# Altium PCB LCD_KB_Controller.PcbDoc (part 1 of 2)
Units mm, origin at the board's own origin, x right, y up, seen from the top; angles counter-clockwise.
Board outline 65 x 95 mm, 2 copper layers (Top Layer, Bottom Layer); 145 components, 109 nets, 476 pads, 326 vias.
Unrouted connection lines stored in the file: 275.
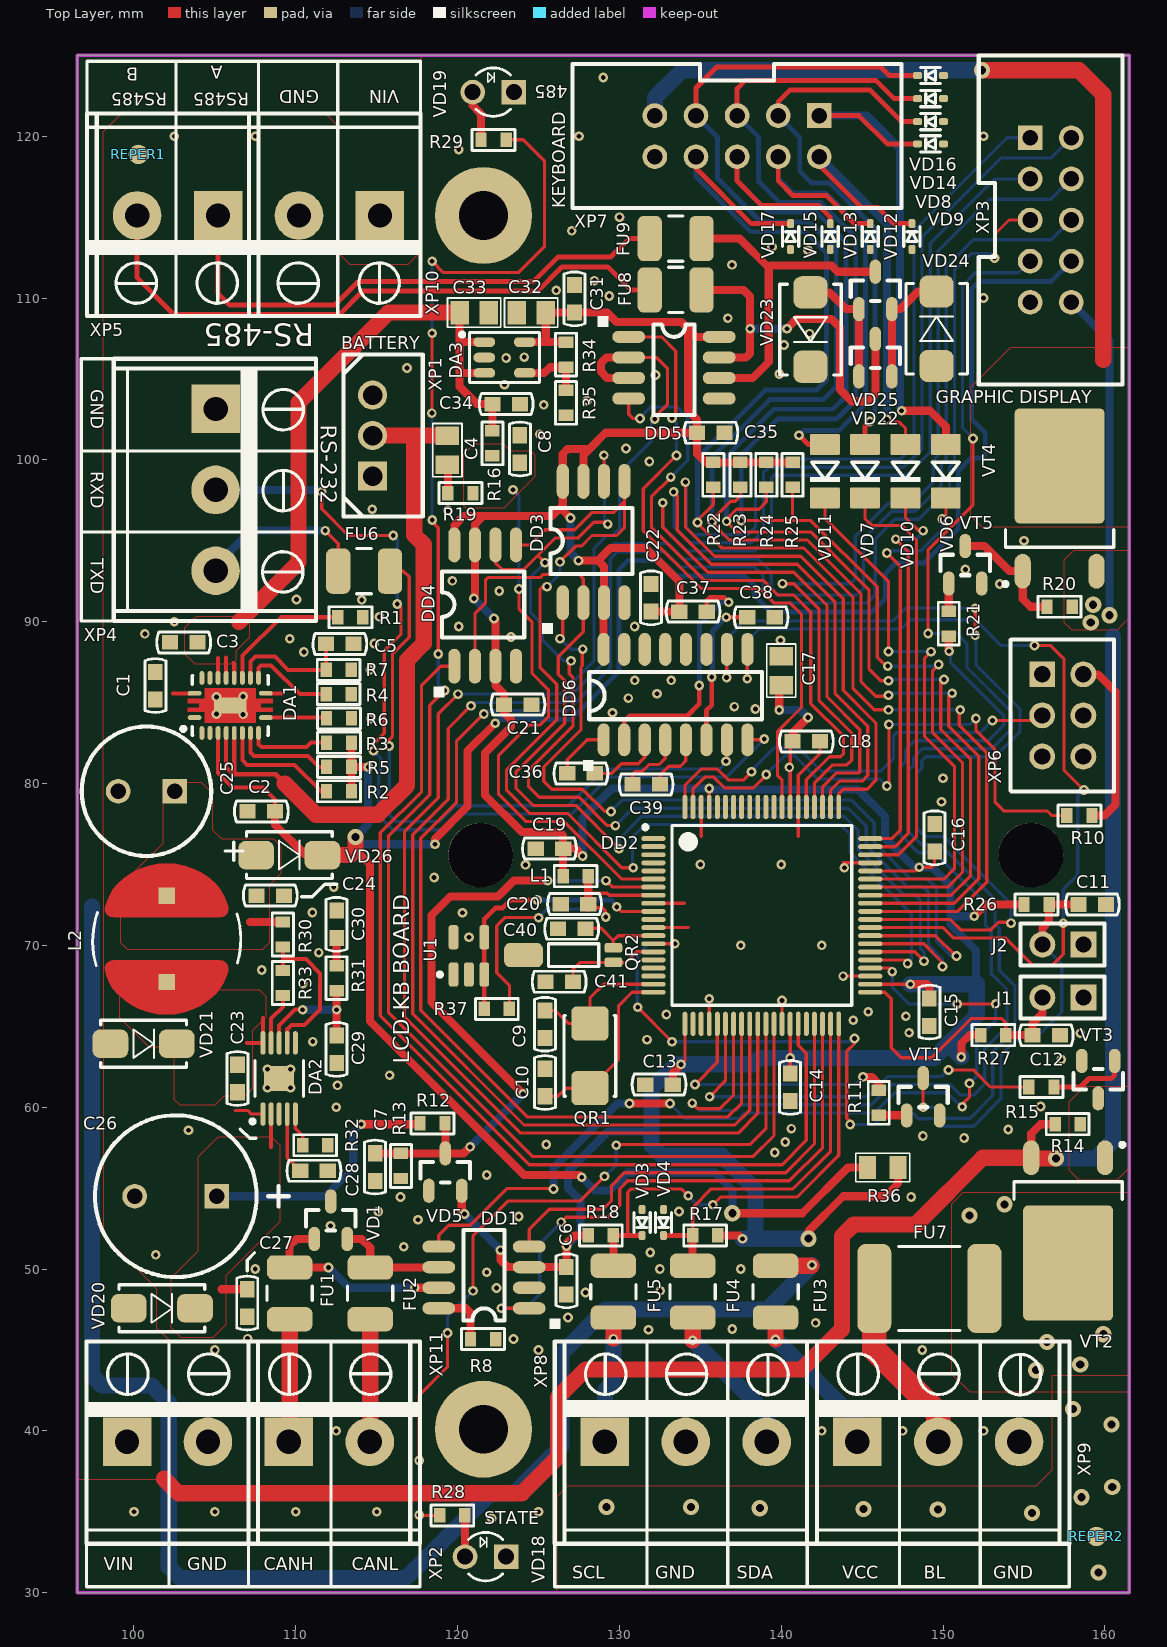
[diagram p0: Top Layer view]
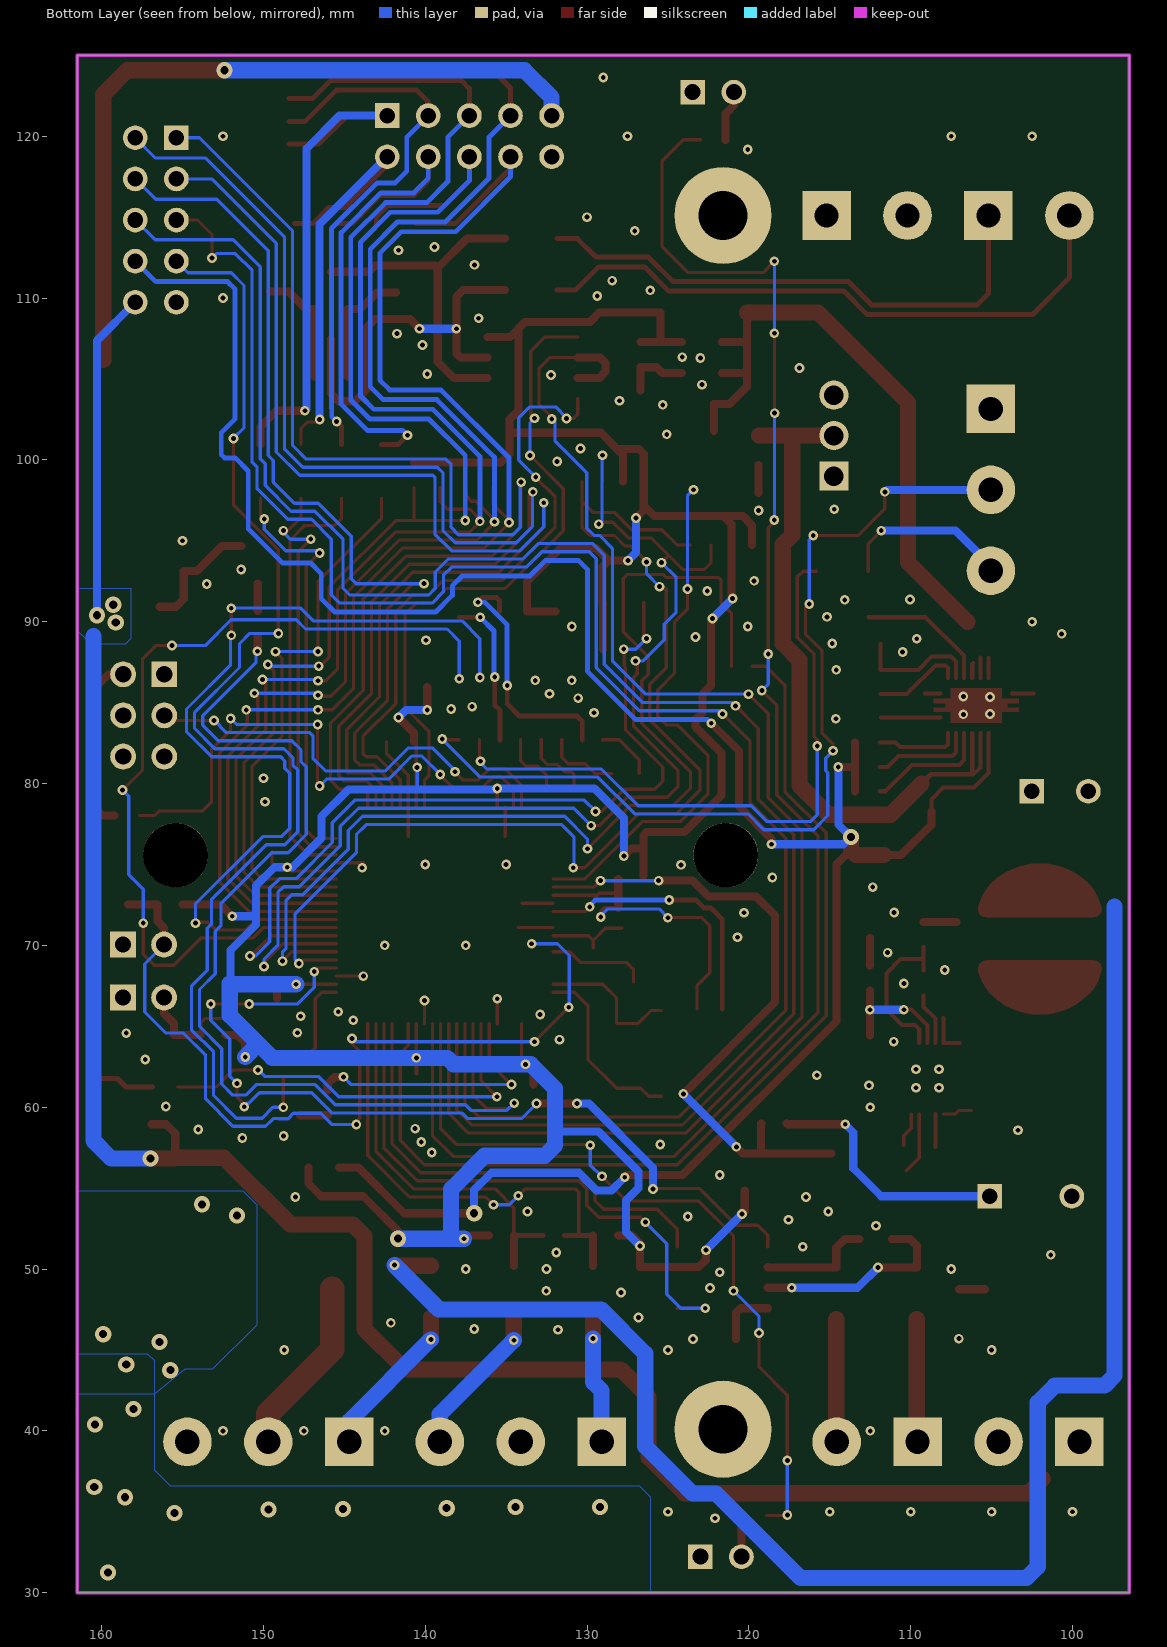
[diagram p1: Bottom Layer view, seen from below]

## Layer stack, top to bottom
Top Solder: solder mask 0.0102, Solder Resist, Dk 3.5
Top Layer: signal copper 0.0356
Dielectric 1: dielectric 0.32, FR-4, Dk 4.8
Bottom Layer: signal copper 0.0356
Bottom Solder: solder mask 0.0102, Solder Resist, Dk 3.5

## Board outline
96.5,30 96.5,125 161.5,125 161.5,30

## Design rules (kind name [scope] priority, off if disabled: settings)
Clearance Clearance_1 [InComponent('DA2') OR InComponent('DA1') OR InComponent('DD2')] p1: gap=0.2 ignorepadtopadclearanceinfootprint=FALSE except(0: Arc-Hole Track-Hole SMDPad-Hole THPad-Hole Via-Hole Fill-Hole Poly-Hole Region-Hole Text-Hole)
Clearance [All] p2: gap=0.3 ignorepadtopadclearanceinfootprint=FALSE except(0: Arc-Hole Track-Hole SMDPad-Hole THPad-Hole Via-Hole Fill-Hole Poly-Hole Region-Hole Text-Hole)
ComponentClearance [All] p1: gap=0.15 collisioncheckmode=3 verticalgap=2540 showdistances=FALSE
HoleSize [All] p1: absolutevalues=TRUE maxlimit=5 minlimit=0.025 maxpercent=80.000 minpercent=20.000
MinimumSolderMaskSliver [All] p1: minsoldermaskwidth=0.15
PolygonConnect PolygonConnect_2 [InComponent('FU7') OR InComponent('XP2') OR InComponent('XP8') OR InComponent('XP9') OR InComponent('XP10') OR InComponent('XP1') OR InComponent('XP4') OR InComponent('XP7')] p1: connectstyle=Relief reliefconductorwidth=0.5 reliefentries=4 polygonreliefangle="90 Angle" airgapwidth=0.3
PolygonConnect PolygonConnect_1 [IsVia OR InComponent('DA2') AND InNet('GND') OR InComponent('VT2') AND InNet('NetFU7_2') OR InNet('NetVT4_2')] p2: connectstyle=Direct reliefconductorwidth=0.254 reliefentries=4 polygonreliefangle="90 Angle" airgapwidth=0.254
PolygonConnect [All] p3: connectstyle=Relief reliefconductorwidth=0.3 reliefentries=4 polygonreliefangle="90 Angle" airgapwidth=0.3
RoutingVias [All] p1: holewidth=0.4 width=0.8 viastyle="Through Hole" minholewidth=0.3 minwidth=0.6 maxholewidth=1 maxwidth=1
SilkToSilkClearance [All] p1: silktosilkclearance=0.15
SilkToSolderMaskClearance [IsPad] p1: minsilkscreentomaskgap=0.15 clearancetoexposedcopper=TRUE
SolderMaskExpansion [All] p1: expansion=0.102
Width [All] p1: maxlimit=3 minlimit=0.2 preferedwidth=0.5
25 further rules are at their usual default settings.

## Classes and differential pairs
component class RS485: C35 DD5 FU8 FU9 VD22 VD23 VD24 VD25
component class Power: C23 C24 C25 C26 C27 C28 C29 C30 C31 C32 C33 C34 DA2 DA3 L2 R30 R31 R32 R33 R34 R35 R36 VD20 VD21 VD26
component class MCU: C9 C10 C11 C12 C13 C14 C15 C16 C17 C18 C19 C20 C21 C22 C40 C41 DD2 DD3 DD4 J1 J2 L1 QR1 QR2 R26 R27 R28 R29 R37 REPER1 REPER2 U1 VD18 VD19
component class Keyboard: R20 R21 R22 R23 R24 R25 VD6 VD7 VD8 VD9 VD10 VD11 VD12 VD13 VD14 VD15 VD16 VD17 VT4 VT5
component class Connection: C7 C8 FU3 FU4 FU5 FU7 R10 R11 R12 R13 R14 R15 R16 R17 R18 R19 VD3 VD4 VD5 VT1 VT2 VT3 XP2 XP3 XP4 XP5 XP6 XP7 XP8 XP9 XP10 XP11
component class CAN: C6 DD1 FU1 FU2 R8 VD1
component class Battery: C1 C2 C3 C4 C5 DA1 R1 R2 R3 R4 R5 R6 R7 XP1
component class RS232: C36 C37 C38 C39 DD6 FU6

## Components (designator, comment, footprint, x,y, rotation, side; value= is the part's Value field where it differs from the comment)
C1 "0.1uF" CC0603#1 101.325,86.05 r90 top
C2 "1uF" CC0603#1 107.875,78.275 r180 top
C3 "1uF" CC0603#1 103.075,88.725 r0 top
C4 "10uFx6.3V" CC0805 119.375,100.6 r90 top
C5 "10nF" CC0603#1 112.725,88.625 r0 top
C6 "0.1uF" CC0603#1 126.725,49.275 r270 top
C7 "0.1uF" CC0603#1 114.9,56.3 r90 top
C8 "0.1uF" CC0603#1 123.85,100.675 r270 top
C9 "22pF" CC0603#1 125.4,65.125 r90 top
C10 "22pF" CC0603#1 125.4,61.525 r270 top
C11 "220pF" CC0603#1 159.225,72.525 r180 top
C12 "220pF" CC0603#1 156.375,64.45 r180 top
C13 "0.1uF" CC0603#1 132.45,61.4 r0 top
C14 "0.1uF" CC0603#1 140.55,61.225 r90 top
C15 "0.1uF" CC0603#1 149.15,65.875 r90 top
C16 "0.1uF" CC0603#1 149.475,76.65 r270 top
C17 "10uFx6.3V" CC0805 140,86.975 r270 top
C18 "0.1uF" CC0603#1 141.55,82.6 r180 top
C19 "0.1uF" CC0603#1 125.675,75.975 r0 top
C20 "0.1uF" CC0603#1 127.225,72.55 r0 top
C21 "0.1uF" CC0603#1 123.725,84.875 r0 top
C22 "0.1uF" CC0603#1 131.95,91.475 r90 top
C23 "0.1 uF" CC0603#1 106.4,61.775 r270 top
C24 "0.1 uF" CC0603#1 108.425,73.075 r0 top
C25 "1000uFx6.3V" CC8X3.5 102.525,79.525 r180 top
C26 "470uFx35V" CC16X10_CAP0.5(1)(Primary) 105.125,54.5 r180 top
C27 "0.1 uF" CC0603#1 107,47.9 r270 top
C28 "10 nF" CC0603#1 111.125,56.075 r0 top
C29 "330pF" CC0603#1 112.525,63.575 r270 top
C30 "560pF" CC0603#1 112.525,71.3 r90 top
C31 "0.1uF" CC0603#1 127.225,109.95 r90 top
C32 "10uFx6.3V" CC0805 124.55,109.1 r0 top
C33 "10uF 6.3V" CC0805 121.025,109.1 r180 top
C34 "0.1uF" CC0603#1 123,103.45 r0 top
C35 "0.1uF" CC0603#1 135.65,101.675 r180 top
C36 "0.1uF" CC0603#1 127.625,80.625 r180 top
C37 "0.1uF" CC0603#1 134.55,90.625 r0 top
C38 "0.1uF" CC0603#1 138.75,90.275 r180 top
C39 "0.1uF" CC0603#1 131.65,79.95 r180 top
C40 "22pF" CC0603#2 127.05,71.025 r0 top
C41 "22pF" CC0603#2 126.275,67.75 r0 top
DA1 "BQ24070" P-PQFP-N20 105.95,84.825 r0 top
DA2 "TPS54260DGQ" S-PDSO-G10 107.975,59.575 r90 top
DA3 "AP2210K-ADJTRG1" SOT23-5 122.9,106.325 r0 top
DD1 "SN65HVD234D" SO-8 124.425,47.575 r90 top
DD2 "LPC1754FBD80" TQFP-80_0.5 138.8,71.85 r0 top
DD3 "M25PE16" EIAJ_SO8 126.5,91.175 r90 top
DD4 "M25PE16" EIAJ_SO8 119.8,87.25 r90 top
DD5 "SP485EEN" SO-8 130.575,107.6 r270 top
DD6 "ST232BD/CD" SO16_M 129.025,82.7 r90 top
FU1 "MICROSMD010F-2" RC1210 109.625,48.5 r270 top
FU2 "MICROSMD010F-2" RC1210 114.6,48.5 r270 top
FU3 "MICROSMD010F-2" RC1210 139.65,48.6 r90 top
FU4 "MICROSMD010F-2" RC1210 134.525,48.6 r90 top
FU5 "MICROSMD010F-2" RC1210 129.625,48.6 r90 top
FU6 "MICROSMD010F-2" RC1210 114.225,93.125 r180 top
FU7 "SL110-33" FSMD2920 149.15,48.8 r0 top
FU8 "MICROSMD010F-2" RC1210 133.475,110.5 r180 top
FU9 "MICROSMD010F-2" RC1210 133.475,113.675 r180 top
J1 "PLS-02" PLS-02 158.675,66.775 r180 top
J2 "PLS-02" PLS-02 158.675,70.05 r180 top
L1 "10uH" L0603 126.525,74.275 r0 top
L2 "15uH" SDR0805 102.025,70.4 r90 top
QR1 "NX5032GA-12.000MHz LN-CD-1" AC5032_2 128.175,63.175 r270 top
QR2 "MS3V-T1R" MS3V-T1R 129.625,68.95 r180 top
R1 "51k" RC0603 113.375,90.275 r0 top
R2 "100k" RC0603 112.675,79.525 r0 top
R3 "100k" RC0603 112.675,82.525 r0 top
R4 "10k" RC0603 112.65,85.525 r0 top
R5 "100k" RC0603 112.675,81.025 r0 top
R6 "2k" RC0603 112.675,84.025 r0 top
R7 "36k" RC0603 112.65,87.025 r0 top
R8 "0E" RC0603 121.575,45.675 r0 top
R10 "100E" RC0603 158.425,78.025 r0 top
R11 "n.p" RC0603 146.025,60.275 r270 top
R12 "120k" RC0603 118.45,59 r0 top
R13 "10k" RC0603 116.5,56.375 r90 top
R14 "10k" RC0603 157.7,58.95 r180 top
R15 "10k" RC0603 156.075,61.25 r0 top
R16 "12k1" RC0603 122.15,101.025 r90 top
R17 "2k2" RC0603 135.3,52.075 r0 top
R18 "2k2" RC0603 128.85,52.075 r180 top
R19 "20k1" RC0603 120.175,97.95 r0 top
R20 "10k" RC0603 157.2,90.925 r0 top
R21 "10k" RC0603 150.35,89.875 r90 top
R22 "10k" RC0603 135.8,99.075 r270 top
R23 "10k" RC0603 137.475,99.075 r270 top
R24 "10k" RC0603 139.075,99.075 r270 top
R25 "10k" RC0603 140.7,99.075 r270 top
R26 "10k" RC0603 155.775,72.525 r0 top
R27 "10k" RC0603 153.1,64.45 r0 top
R28 "1k" RC0603 119.675,34.775 r0 top
R29 "1k" RC0603 122.225,119.775 r180 top
R30 "68k1 1%" RC0603 109.2,70.675 r90 top
R31 "12k" RC0603 112.525,67.975 r270 top
R32 "240k" RC0603 111.2,57.65 r180 top
R33 "13k 1%" RC0603 109.2,67.675 r90 top
R34 "11k 1%" RC0603 126.7,106.5 r90 top
R35 "18k 1%" RC0603 126.7,103.525 r90 top
R36 "n.p" RC0805 146.275,56.275 r0 top
R37 "200E" RC0603 122.425,66.075 r180 top
REPER1 "REPER1.2" REPER1.2 100.275,118.875 r90 top
REPER2 "REPER1.2" REPER1.2 159.475,33.475 r90 top
U1 "TL431AIDBVR" TI-DBV5_N 120.7,69.35 r90 top
VD1 "PESD2CAN" SOT-23(123) 111.15,51.85 r270 top
VD3 "ESD5Z3.3T1G/T5G" SOD-523 131.4,52.875 r270 top
VD4 "ESD5Z3.3T1G/T5G" SOD-523 132.725,52.875 r270 top
VD5 "BAT54S" SOT-23(GSD) 118.225,54.825 r0 top
VD6 "LL4148" SOD-80 150.175,99.3 r90 top
VD7 "LL4148" SOD-80 145.175,99.3 r90 top
VD8 "ESD5Z3.3T1G/T5G" SOD-523 149.225,120.9 r180 top
VD9 "ESD5Z3.3T1G/T5G" SOD-523 149.225,119.525 r180 top
VD10 "LL4148" SOD-80 147.675,99.3 r90 top
VD11 "LL4148" SOD-80 142.7,99.3 r90 top
VD12 "ESD5Z3.3T1G/T5G" SOD-523 148.075,113.8 r90 top
VD13 "ESD5Z3.3T1G/T5G" SOD-523 145.5,113.8 r90 top
VD14 "ESD5Z3.3T1G/T5G" SOD-523 149.225,122.325 r180 top
VD15 "ESD5Z3.3T1G/T5G" SOD-523 143.025,113.8 r90 top
VD16 "ESD5Z3.3T1G/T5G" SOD-523 149.225,123.75 r180 top
VD17 "ESD5Z3.3T1G/T5G" SOD-523 140.575,113.8 r90 top
VD18 "LED_3" LED3 123,32.225 r180 top
VD19 "LED_3" LED3 123.475,122.725 r180 top
VD20 "GS1M" SMA 101.725,47.575 r0 top value={Value}
VD21 "SK34SMA" SMA 100.6,63.925 r0 top value={Value}
VD22 "BAV99" SOT-23(GSD) 144.8,105.15 r0 top
VD23 "SMBJ5.0A" SMB 141.8,108.05 r90 top
VD24 "SMBJ5.0A" SMB 149.6,108.1 r270 top
VD25 "BAV99" SOT-23(GSD) 144.8,109.3 r0 top
VD26 "GS1M" SMA 109.6,75.575 r0 top
VT1 "n.p" SOT-23(123) 147.75,59.475 r270 top
VT2 "FQD5P20TM" D-PAK(TO-252AA) 157.725,52.375 r270 top
VT3 "BC817-40" SOT-23(123) 160.6,62.875 r90 top
VT4 "FQD5P20TM" D-PAK(TO-252AA) 157.2,97.625 r90 top
VT5 "BC817-40" SOT-23(123) 150.35,92.35 r270 top
XP1 "MW03D" MW03D 114.75,99 r90 top
XP2 "DG330-2PIN" DG330-2PIN 102.175,39.3 r0 top
XP3 "n.p" BH-10 155.375,119.9 r270 top
XP4 "DG330-3P" DG330-3PIN 105.05,98.15 r270 top
XP5 "DG330-2PIN" DG330-2PIN 102.6,115.125 r180 top
XP6 "PLD-06" PIN6 156.125,86.75 r270 top
XP7 "BH-10" BH-10 142.35,121.275 r180 top
XP8 "DG330-3PIN" DG330-3PIN 134.1,39.325 r0 top
XP9 "DG330-3PIN" DG330-3PIN 149.7,39.325 r0 top
XP10 "DG330-2PIN" DG330-2PIN 112.6,115.125 r180 top
XP11 "DG330-2PIN" DG330-2PIN 112.175,39.3 r0 top

## Footprints (in the part's own frame and the unit in brackets; to place one, negate y for a bottom-side part, rotate by r counter-clockwise, add the part's x,y. Pads: shape width x height; smd on the part's side, far side on the other; paste and mask are expansions set on the pad)
AC5032_2 [mm]
  rrect30% 2.1x2.3 smd mask+0.05: 1(-2,0) 2(2,0)
  silkscreen extent -2.5,-1.6 2.5,1.6
BH-10 [mil]
  rect 60x60 hole 38 mask+1.97: 1(0,0)
  round 60 hole 38 mask+1.97: 2(0,100) 3(100,0) 4(100,100) 5(200,0) 6(200,100) 7(300,0) 8(300,100) 9(400,0) 10(400,100)
  silkscreen extent -200,-125 600,225
CC8X3.5 [mil]
  rect 60x60 hole 38 mask+1.97: 1(0,0)
  round 60 hole 38 mask+1.97: 2(137.8,0)
  silkscreen extent -89,-157 226,157
CC16X10_CAP0.5(1)(Primary) [mil]
  round 60 hole 38 mask+1.97: 1(200,0)
  rect 60x60 hole 38 mask+1.97: 2(0,0)
  silkscreen extent -175,-197 297,197
CC0603#1 [mm]
  rect 1x0.9 smd paste-25.4 mask+0.05: 1(-0.85,0) 2(0.85,0)
  silkscreen extent -1.66,-0.65 1.66,0.65
CC0603#2 [mm]
  rect 1x0.9 smd paste-25.4: 1(-0.85,0) 2(0.85,0)
  silkscreen extent -1.66,-0.65 1.66,0.65
CC0805 [mm]
  rect 1.15x1.45 smd paste-25.4 mask+0.05: 1(-0.9,0) 2(0.9,0)
  silkscreen extent -1.65,-0.9 1.65,0.9
D-PAK(TO-252AA) [mm]
  oval 2.15x1 smd mask+0.05: 1(-4.5,2.28) 3(-4.5,-2.28)
  rrect10% 7.1x5.55 smd mask+0.05: 2(2,0)
  silkscreen extent -5.42,-3.35 -1.92,3.47
DG330-2PIN [mm]
  rect 3x3 hole 1.5 mask+0.05: 1(-2.6,0.025)
  round 3 hole 1.5 mask+0.05: 2(2.4,0.025)
  silkscreen extent -5.1,-6.27 5.6,6.23
DG330-3PIN [mm]
  rect 3x3 hole 1.5 mask+0.05: 1(-5,0)
  round 3 hole 1.5 mask+0.05: 2(0,0) 3(5,0)
  silkscreen extent -8.1,-6.3 8.1,6.2
EIAJ_SO8 [mil]
  oval 85x29.53 smd mask+1.97: 1(0,0) 2(0,-50) 3(0,-100) 4(0,-150) 5(295,-150) 6(295,-100) 7(295,-50) 8(295,0)
  silkscreen extent -75,-170 230,50
FSMD2920 [mm]
  rrect50% 2.1x5.5 smd mask+0.05: 1(-3.4,0) 2(3.4,0)
  silkscreen extent -1.9,-2.6 1.9,2.6
L0603 [mm]
  rect 0.7x0.9 smd paste-25.4 mask+0.05: 1(0,0) 2(1.549,0)
  silkscreen extent -0.55,-0.65 2.1,0.65
LED3 [mil]
  rect 60x60 hole 39 mask+1.97: 1(0,0)
  round 60 hole 39 mask+1.97: 2(100,0)
  silkscreen extent 8,-59 92,59
MS3V-T1R [mm]
  rrect50% 1.1x0.6 smd mask+0.05: 1(0,0) 2(0,-0.9)
  rrect50% 2.4x1.5 smd mask+0.05: 3(5.55,-0.45)
  silkscreen extent 0.9,-1.15 4,0.25
MW03D [mm]
  rect 1.8x1.8 hole 1.2 mask+0.05: 1(0,0)
  round 1.8 hole 1.2 mask+0.05: 2(2.5,0) 3(5,0)
  silkscreen extent -2.5,-3.1 7.5,1.8
P-PQFP-N20 [mm]
  oval 0.85x0.3 smd mask+0.05: 1(-2.2,-0.75) 10(2.2,-0.75) 11(2.2,0.75) 20(-2.2,0.75)
  oval 0.3x0.85 smd mask+0.05: 2(-1.75,-1.7) 3(-1.25,-1.7) 4(-0.75,-1.7) 5(-0.25,-1.7) 6(0.25,-1.7) 7(0.75,-1.7) 8(1.25,-1.7) 9(1.75,-1.7) 12(1.75,1.7) 13(1.25,1.7) 14(0.75,1.7) 15(0.25,1.7) 16(-0.25,1.7) 17(-0.75,1.7) 18(-1.25,1.7) 19(-1.75,1.7)
  rect 2x1 smd paste-25.4 mask+0.05: 21(0,0)
  Top Layer region: -1.575,-1.075 1.575,-1.075 1.575,-0.4 2.625,-0.4 2.625,-0.15 1.9,-0.15 1.9,0.15 2.625,0.15 2.625,0.4 1.575,0.4 1.575,1.075 -1.575,1.075 -1.575,0.4 -2.625,0.4 -2.625,0.15 -1.9,0.15 -1.9,-0.15 -2.625,-0.15 -2.625,-0.4 -1.575,-0.4
  silkscreen extent -3.02,-1.85 2.35,1.85
PIN6 [mm]
  rect 1.6x1.6 hole 1 mask+0.05: 1(0,0)
  round 1.6 hole 1 mask+0.05: 2(0,2.54) 3(2.54,0) 4(2.54,2.54) 5(5.08,0) 6(5.08,2.54)
  silkscreen extent -2.16,-1.96 7.24,4.45
PLS-02 [mm]
  rect 1.6x1.6 hole 1 mask+0.05: 1(0,0)
  round 1.6 hole 1 mask+0.05: 2(2.54,0)
  silkscreen extent -1.3,-1.3 3.9,1.3
RC0603 [mm]
  rect 0.7x0.9 smd paste-25.4 mask+0.05: 1(-0.775,0) 2(0.774,0)
  silkscreen extent -1.32,-0.65 1.33,0.65
RC0805 [mm]
  rect 1.05x1.4 smd paste-25.4 mask+0.05: 1(-0.95,0) 2(0.95,0)
  silkscreen extent -1.67,-0.89 1.67,0.89
RC1210 [mm]
  rrect50% 1.5x2.8 smd mask+0.05: 1(-1.6,0) 2(1.6,0)
  silkscreen extent -0.45,-1.4 0.45,1.4
REPER1.2 [mm]
  round 1.2 smd paste-25.4 mask+0.05: 1(0,0)
  Top Layer pour cut-out: -1.2,-1.2 1.2,-1.2 1.2,1.2 -1.2,1.2
S-PDSO-G10 [mm]
  oval 1.45x0.3 smd mask+0.05: 1(0,0) 2(0,-0.5) 3(0,-1) 4(0,-1.5) 5(0,-2) 6(4.4,-2) 7(4.4,-1.5) 8(4.4,-1) 9(4.4,-0.5) 10(4.4,0)
  rect 1.55x1.85 smd mask+0.05: 11(2.2,-1)
  silkscreen extent -0.57,-2.5 3.3,0.77
SDR0805 [mm]
  rect 1x1 smd paste-25.4 mask+0.05: 1(-2.667,0) 2(2.667,0)
  Top Layer region: -1.327,3.319 -1.362,3.503 -1.461,3.66 -1.612,3.771 -1.792,3.818 -1.977,3.797 -2.318,3.69 -2.706,3.535 -3.065,3.321 -3.387,3.053 -3.392,3.047 -3.771,2.627 -4.09,2.16 -4.345,1.654 -4.53,1.119 -4.642,0.565 -4.68,0 -4.642,-0.565 -4.53,-1.119 -4.345,-1.654 -4.09,-2.16 -3.771,-2.627 -3.392,-3.047 -3.381,-3.059 -3.063,-3.323 -2.709,-3.534 -2.325,-3.688 -1.996,-3.791 -1.806,-3.813 -1.62,-3.764 -1.465,-3.65 -1.363,-3.488 -1.327,-3.299
  Top Layer region: 1.327,-3.319 1.362,-3.503 1.461,-3.66 1.612,-3.771 1.792,-3.818 1.977,-3.797 2.318,-3.69 2.706,-3.535 3.065,-3.321 3.387,-3.053 3.392,-3.047 3.771,-2.627 4.09,-2.16 4.345,-1.654 4.53,-1.119 4.642,-0.565 4.68,0 4.642,0.565 4.53,1.119 4.345,1.654 4.09,2.16 3.771,2.627 3.392,3.047 3.381,3.059 3.063,3.323 2.709,3.534 2.325,3.688 1.996,3.791 1.806,3.813 1.62,3.764 1.465,3.65 1.363,3.488 1.327,3.299
  silkscreen extent -1.66,-4.57 1.64,4.57
SMA [mm]
  rrect50% 2.2x1.75 smd mask+0.05: 1(-2.05,0) 2(2.05,0)
  silkscreen extent -2.65,-1.45 2.65,1.45
SMB [mm]
  rrect50% 2x2.1 smd mask+0.05: 1(2.3,0) 2(-2.3,0)
  silkscreen extent -2.8,-1.9 2.8,1.9
SO16_M [mil]
  oval 80x29.53 smd mask+1.97: 1(0,0) 2(0,-50) 3(0,-100) 4(0,-150) 5(0,-200) 6(0,-250) 7(0,-300) 8(0,-350) 9(220,-350) 10(220,-300) 11(220,-250) 12(220,-200) 13(220,-150) 14(220,-100) 15(220,-50) 16(220,0)
  silkscreen extent -75,-385 165,50
SO-8 [mil]
  oval 29.53x80 smd mask+1.97: 1(0,0) 2(50,0) 3(100,0) 4(150,0) 5(150,220) 6(100,220) 7(50,220) 8(0,220)
  silkscreen extent -50,-75 190,160
SOD-80 [mm]
  rrect10% 1.3x1.83 smd paste-25.4 mask+0.05: 1(1.651,0) 2(-1.651,0)
  silkscreen extent -0.66,-0.91 0.56,0.91
SOD-523 [mm]
  rrect50% 0.55x0.42 smd mask+0.05: 1(-0.8,0) 2(0.8,0)
  silkscreen extent -0.6,-0.5 0.6,0.5
SOT23-5 [mm]
  oval 1.35x0.6 smd mask+0.05: 1(-1.25,0.95) 2(-1.25,0) 3(-1.25,-0.95) 4(1.25,-0.95) 5(1.25,0.95)
  silkscreen extent -2.74,-1.55 2.16,1.55
SOT-23(123) [mil]
  oval 59.06x28.07 smd mask+1.97: 1(-0.5,0) 2(-0.5,80) 3(-91.5,40)
  silkscreen extent -71,-20 -21,100
SOT-23(GSD) [mil]
  oval 28.07x59.06 smd mask+1.97: 1(0,0.5) 2(80,0.5) 3(40,91.5)
  silkscreen extent -20,20 100,70
TI-DBV5_N [mm] "SOT23, 5-Leads, Body 2.9x1.6mm, Pitch 0.95mm, IPC Medium Density"
  rrect50% 1.5x0.6 smd mask+0.05: 1(-1.15,0.95) 2(-1.15,0) 3(-1.15,-0.95) 4(1.15,-0.95) 5(1.15,0.95)
  silkscreen extent -1.27,1.68 -1.03,1.92, body extent -0.87,-1.52 0.87,1.53, height 1.45
TQFP-80_0.5 [mm]
  oval 1.5x0.3 smd mask+0.05: 1(-6.7,4.75) 2(-6.7,4.25) 3(-6.7,3.75) 4(-6.7,3.25) 5(-6.7,2.75) 6(-6.7,2.25) 7(-6.7,1.75) 8(-6.7,1.25) 9(-6.7,0.75) 10(-6.7,0.25) 11(-6.7,-0.25) 12(-6.7,-0.75) 13(-6.7,-1.25) 14(-6.7,-1.75) 15(-6.7,-2.25) 16(-6.7,-2.75) 17(-6.7,-3.25) 18(-6.7,-3.75) 19(-6.7,-4.25) 20(-6.7,-4.75) 41(6.7,-4.75) 42(6.7,-4.25) 43(6.7,-3.75) 44(6.7,-3.25) 45(6.7,-2.75) 46(6.7,-2.25) 47(6.7,-1.75) 48(6.7,-1.25) 49(6.7,-0.75) 50(6.7,-0.25) 51(6.7,0.25) 52(6.7,0.75) 53(6.7,1.25) 54(6.7,1.75) 55(6.7,2.25) 56(6.7,2.75) 57(6.7,3.25) 58(6.7,3.75) 59(6.7,4.25) 60(6.7,4.75)
  oval 0.3x1.5 smd mask+0.05: 21(-4.75,-6.7) 22(-4.25,-6.7) 23(-3.75,-6.7) 24(-3.25,-6.7) 25(-2.75,-6.7) 26(-2.25,-6.7) 27(-1.75,-6.7) 28(-1.25,-6.7) 29(-0.75,-6.7) 30(-0.25,-6.7) 31(0.25,-6.7) 32(0.75,-6.7) 33(1.25,-6.7) 34(1.75,-6.7) 35(2.25,-6.7) 36(2.75,-6.7) 37(3.25,-6.7) 38(3.75,-6.7) 39(4.25,-6.7) 40(4.75,-6.7) 61(4.75,6.7) 62(4.25,6.7) 63(3.75,6.7) 64(3.25,6.7) 65(2.75,6.7) 66(2.25,6.7) 67(1.75,6.7) 68(1.25,6.7) 69(0.75,6.7) 70(0.25,6.7) 71(-0.25,6.7) 72(-0.75,6.7) 73(-1.25,6.7) 74(-1.75,6.7) 75(-2.25,6.7) 76(-2.75,6.7) 77(-3.25,6.7) 78(-3.75,6.7) 79(-4.25,6.7) 80(-4.75,6.7)
  silkscreen extent -7.32,-5.55 5.55,5.57

## Part data
C1 C2 C3 C5 C6 C7 C8 C9 C10 C11 C12 C13 C14 C15 C16 C18 C19 C20 C21 C22 C23 C24 C27 C28 C29 C30 C31 C34 C35 C36 C37 C38 C39 C40 C41: library part CC0603, "CC0603"
C4 C17 C32 C33: library part CC0805, "CC0805"
C25: library part CAP0.35, "CAP0.35"
C26: library part CAP0.5(1), "CAP0.5(1)"
DA3: library part MCP1824T-ADJE/OT, "300 mA, Low Voltage, Low Quiescent Current LDO Regulator, 5-Pin SOT-223, Extended Temperature, Tape and Reel", ComponentLink1Description="Manufacturer Link", ComponentLink1URL=http://www.microchip.com, ComponentLink2Description=Datasheet, ComponentLink2URL=http://ww1.microchip.com/downloads/en/DeviceDoc/22070a.pdf, ComponentLink3Description="Packaging Specification", ComponentLink3URL=http://ww1.microchip.com/downloads/en/PackagingSpec/00049AW.pdf, DatasheetVersion="revA, Aug-2007", PackageDescription="5-Lead Plastic Small Outline Transistor (DC) [SOT-223]", PackageReference=SOT-223-DC5, PackageVersion="revAW, Oct-2008", Published=29-Jan-2009, Publisher="Altium Limited"
DD1: "CAN Transceiver"
DD2: "Cortex -M3 32-Bit Microcontroller, 128KB Flash, 64KB RAM, 800-Lead LQFP", ComponentLink1Description="Manufacturer Link", ComponentLink1URL=http://www.nxp.com/
DD3 DD4: library part S25FL016A0LMFI01, "S25FL016A0LMFI01"
DD5: library part SP485, "SP485"
FU1 FU2 FU3 FU4 FU5 FU6 FU8 FU9: library part MICROSMD, "MICROSMD"
FU7: library part FSMD2920, "FSMD150-2920"
L1: library part L0603, "L0603"
L2: library part SDR0805, "SDR0805"
QR1: library part AC5032_2, "AC5032/2"
QR2: "CRYSTAL_32768 Hz"
R1 R2 R3 R4 R5 R6 R7 R8 R10 R11 R12 R13 R14 R15 R16 R17 R18 R19 R20 R21 R22 R23 R24 R25 R26 R27 R28 R29 R30 R31 R32 R33 R34 R35 R37: library part RC0603, "RC0603"
R36: library part RC0805, "RC0805"
U1: "Adjustable Precision Shunt Regulator, 34 ppm / degC, 100 mA, -40 to 85 degC, 5-pin SOT-23 (DBV), Green (RoHS & no Sb/Br)", Manufacturer="Texas Instruments", Rating=Catalog, Supplier Part Number 1=296-15237-2-ND, Temp Coeff(Max)(ppm/ degree C)=92, Temp Coeff(Typ)(ppm/ degree C)=34, Code_JEDEC=MO-178, ComponentLink1Description="Manufacturer URL", ComponentLink1URL=http://www.ti.com/, ComponentLink2Description=Datasheet, ComponentLink2URL=http://www.ti.com/general/docs/lit/getliterature.tsp?genericPartNumber=TL431A&fileType=pdf, ComponentLink3Description="Package Specification", ComponentLink3URL=http://www.ti.com/litv/pdf/mpds018i, ComponentLink4Description="URL Link1", ComponentLink4URL="Samples URL:http://www.ti.com/product/tl431a", DatasheetVersion=SLVS543M, Eco-Plan="Green (RoHS & no Sb/Br)", Initial Accuracy @ 25/deg C(%)=1, Iout/Iz(Max)(mA)=100, Min Iz for Regulation(uA)=600, Mounting Technology="Surface Mount", PackageDescription="5-Pin Plastic Small Outline, Body 1.60 × 2.90 mm, Pitch 0.95 mm", PackageReference=DBV5, PackageVersion=4073253-4/K, PartNumber=TL431AIDBVR, SubFamily="Shunt Voltage Reference", Supplier 1=Digi-Key, Supplier 2=Digi-Key, Supplier 3=Digi-Key, Supplier 4=Newark, Supplier 5=Mouser, Supplier Part Number 2=296-15237-1-ND, Supplier Part Number 3=296-15237-6-ND, Supplier Part Number 4=61H5522, Supplier Part Number 5=595-TL431AIDBVR, VO Adj(Max)(V)=36, VO Adj(Min)(V)=2.495
VD1: "TVS for CAN"
VD3 VD4 VD8 VD9 VD12 VD13 VD14 VD15 VD16 VD17: library part ESD5Z, "Supressor"
VD5 VD22 VD25: "1.0 Ampere General Purpose Rectifier", ComponentField6="Published 8-Jun-2000, Modified 11-July-2000: SIM Model Added."
VD21: "Schottky Rectifier"
VD23 VD24: library part SMBJ, "SMBJ"
VD26: library part SS14, "Schottky Rectifier", ComponentField6="Published 8-Jun-2000, Modified 10-July-2000: SIM Model Added.", OriginalName=10BQ100
VT1 VT3 VT5: library part BC846BLT1, "NPN 500ma transistor"
  VT3 VT5: ComponentField7="Published 29-Sep-2000", OriginalName=BC846BLT1
VT2 VT4: library part IRFR9220, "HEXFET Power MOSFET", ComponentField7="Published 8-Jun-2000", OriginalName=IRLML5103
XP3: library part BH-10, "BH-10"
XP4: library part DG330-3PIN
XP6: "PLD06"

## Free pads (board coordinates)
  round 4 hole 4 unplated mask+0.05: 0(121.425,75.575) 0(155.425,75.575)
  round 6 hole 3 unplated mask+0.05: 0(121.6,40.1) 0(121.6,115.1)

## Via types
v1: diameter 0.6, hole 0.3, Top Layer to Bottom Layer, 301 vias
v2: diameter 1, hole 0.5, Top Layer to Bottom Layer, 25 vias

## Nets (pads, with @x,y where several pads share a name; then routed paths per layer and width w, separated by ;. In a path a pad name is that pad's centre, name@x,y a point inside that pad or via, vN(x,y) a via of type N, cw(c..) or ccw(c..) an arc to the next point about the centre after c; other vN are vias at no path point)
+3V3: C6.1 C13.2 C14.2 C15.2 C16.2 C17.2 C18.2 C19.2 C21.1 C22.1 C31.1 C32.2 C35.2 C37.1 DA3.5 DD1.3 DD2.21 DD2.34 DD2.42 DD2.56 DD2.67 DD2.77 DD3.3 DD3.7 DD3.8 DD4.3 DD4.7 DD4.8 DD5.8 DD6.16 L1.1 R17.2 R18.2 R22.1 R23.1 R24.1 R25.1 R26.1 R27.1 R34.2 R36.2 VD5.2 | length 253.9
  Top Layer w0.2: v1(133.8,62.65) 134.05,62.9 DD2.21@134.05,65.15 ; DD2.77@135.55,78.55 v1(135.55,79.7) ; v1(140.55,63.05) DD2.34@140.55,65.15 ; DD2.67@140.55,78.55 140.55,82.45 C18.2@140.7,82.6 ; DD2.42@145.5,67.6 v1(147.975,67.6) ; DD2.56@145.5,74.6 148.3,74.6 v1(148.525,74.825) 149.3,74.825 149.475,75 C16.2@149.475,75.8
  Top Layer w0.25: C14.2@140.55,62.075 v1(140.55,63.05)
  Top Layer w0.5: DD4.8@119.8,94.743 119.8,95.95 120.375,96.525 121.575,96.525 ; VD5.2@120.257,54.838 120.257,53.568 v1(120.425,53.4) ; v1(121.006,91.429) 121.07,91.494 DD4.7@121.07,94.743 121.07,96.02 121.575,96.525 ; v1(122.25,90.2) 122.34,90.11 DD4.3@122.34,87.25 122.34,86.06 122.875,85.525 C21.1@122.875,84.875 122.875,84.377 123.3,83.952 123.3,83.498 121.7,81.898 121.7,79.275 123.975,77 126.325,77 126.525,76.8 C19.2@126.525,75.975 ; v1(122.657,51.168) 122.657,50.568 123.11,50.115 DD1.3@124.425,50.115 126.665,50.115 C6.1@126.725,50.175 ; DA3.5@124.15,107.275 R34.2@126.7,107.274 ; 125.45,107.349 C32.2@125.45,109.1 C31.1@127.225,109.1 129.25,109.1 129.825,108.525 133.825,108.525 134.75,107.6 DD5.8@136.163,107.6 ; L1.1@126.525,74.275 C19.2@126.525,75.975 ; C6.1@126.725,50.125 C6.1@126.725,50.175 ; v1(126.725,51.425) C6.1@126.725,50.175 ; v1@126.725,51.575 127.225,52.075 R18.2@128.076,52.075 ; v1(126.981,96.405) 126.5,96.886 126.5,97.175 ; v1(127.475,93.775) 128.675,93.775 ; v1(127.725,75.525) 127.275,75.975 C19.2@126.525,75.975 ; DD3.7@127.77,98.668 127.77,100.295 128.15,100.675 ; DD6.16@129.025,88.288 129.025,91.16 DD3.3@129.04,91.175 129.04,93.41 128.675,93.775 ; C22.1@131.95,90.625 C37.1@133.7,90.625 133.7,92.477 131.626,94.551 129.451,94.551 128.675,93.775 ; C13.2@133.3,61.4 133.3,62.15 v1(133.8,62.65) ; 134.225,108 134.225,103.075 134.8,102.5 C35.2@134.8,101.675 ; R17.2@136.074,52.075 137.4,52.075 v1(137.6,51.875) ; v1(139.875,84.55) C17.2@139.875,85.95 ; C18.2@140.7,82.6 140.7,83.122 v1(141.657,84.079) ; R25.1@140.7,99.85 R24.1@139.075,99.85 R23.1@137.475,99.85 R22.1@135.8,99.85 135.325,99.85 134.8,100.375 C35.2@134.8,101.675 ; v2(141.675,51.875) 141.675,52.344 143.831,54.5 146.425,54.5 147.225,55.3 R36.2@147.225,56.275 ; v1(147.975,67.6) 149,67.6 149.15,67.45 C15.2@149.15,66.725 ; v1(151.125,63.1) 151.125,63.95 151.625,64.45 R27.1@152.325,64.45 ; v1(151.925,71.8) 152.65,72.525 R26.1@155,72.525 ; 121.575,96.525 125.85,96.525 126.5,97.175 ; 126.5,97.175 DD3.8@126.5,98.668 126.5,100.375 126.8,100.675 128.15,100.675 ; 128.15,100.675 129.15,101.675 C35.2@134.8,101.675
  Bottom Layer w0.2: 140.5,79.625 v1(140.5,81)
  Bottom Layer w0.5: v1(120.425,53.4) v1(122.657,51.168) ; v1(121.006,91.429) 121.021,91.429 v1(122.25,90.2) ; v1(126.725,51.425) 127.6,52.3 127.6,54.225 126.825,55 126.825,56.027 129.298,58.5 131.925,58.5 131.975,58.55 ; v1(126.981,96.405) 126.981,94.269 v1(127.475,93.775) ; v1(127.725,75.525) 127.725,77.875 129.55,79.7 v1(135.55,79.7) 135.625,79.625 140.5,79.625 144.75,79.625 146.4,77.975 146.4,76.626 148.201,74.825 v1(148.525,74.825) 149.325,74.825 150.45,73.7 150.45,71.275 152.025,69.7 152.025,67.6 ; v1(139.875,84.55) 141.186,84.55 v1(141.657,84.079) ; 150.475,71.8 v1(151.925,71.8)
  Bottom Layer w1: v1(137.6,51.875) v2(141.675,51.875) ; 138.4,51.975 138.4,54.935 136.335,57 132.625,57 131.975,57.65 131.975,58.55 131.975,61.15 133.475,62.65 v1(133.8,62.65) 138.25,62.65 138.65,63.05 v1(140.55,63.05) 149.45,63.05 150.312,63.912 ; v1(147.975,67.6) 152.025,67.6 152.075,67.65 152.075,65.675 150.312,63.912 ; v1(151.125,63.1) 150.312,63.912
+4V3: C2.1 DA1.4 R2.2 R3.2 R5.2 R36.1 VD26.2 XP3.8 | length 151.5
  Top Layer w0.25: DA1.4@105.2,83.125 105.2,80.65 106.1,79.75 108,79.75 108.725,79.025 C2.1@108.725,78.275
  Top Layer w0.5: C2.1@108.725,78.275 108.725,77.45 110.6,75.575 VD26.2@111.65,75.575 ; R2.2@113.449,79.525 R5.2@113.449,81.025 ; R3.2@113.449,82.525 R5.2@113.449,81.025 ; 113.7,75.9 114.575,75.025 114.575,65.325 124.1,55.8 127.55,55.8 v1(127.675,55.675) ; v1(114.475,81.025) R5.2@113.449,81.025 ; v1(118.6,76.25) 118.6,76.581 120.6,78.581 120.6,82 v1(122.325,83.725) ; v2(136.975,53.45) 141.3,53.45 144.125,56.275 R36.1@145.325,56.275
  Top Layer w1: VD26.2@111.65,75.575 113.375,75.575 113.7,75.9 v2(113.7,76.7)
  Bottom Layer w0.3: v1(122.325,83.725) 122.55,83.95 126.992,83.95 129.981,86.939 129.981,93.231 130.525,93.775 132.579,93.775 133.529,92.825 137.725,92.825 138.325,92.225 138.325,91.625 139.35,90.6 145.6,90.6 146.425,91.425 146.425,92.975 147.088,93.638 148.838,93.638 150.938,95.738 150.938,99.313 151.75,100.125 152.4,100.125 152.6,100.325 152.6,101.686 151.75,102.536 151.75,110.547 152.216,111.014 156.649,111.014 XP3.8@157.915,112.28
  Bottom Layer w0.5: v1(114.475,81.025) 114.475,77.475 v2(113.7,76.7) 114.15,76.25 v1(118.6,76.25) ; v1(127.675,55.675) 128.5,54.85 129.406,54.85 129.931,55.376 129.931,55.381 130.5,55.95 135.9,55.95 136.975,54.875 v2(136.975,53.45)
+5V: C24.1 C25.1 FU3.2 L2.2 R30.2 VD26.1 | length 100.2
  Top Layer w0.5: 107.174,71.449 R30.2@109.2,71.449
  Top Layer w1: FU3.2@139.65,50.2 v1@141.85,50.2
  Bottom Layer w1: 97.4,72.4 97.4,43.425 98.025,42.8 101.1,42.8 102.15,41.75 102.15,31.6 102.85,30.9 116.8,30.9 122.025,36.125 123.475,36.125 126.4,39.05 126.4,44.775 129.125,47.5 139.15,47.5 v1(141.9,50.25)
BL_7SEG: DD2.26 R15.1 | length 25.7
  Top Layer w0.2: v1(135.575,60.65) 136.55,61.625 DD2.26@136.55,65.15 ; v1(150.332,62.303) 151.872,62.303 152.925,61.25 R15.1@155.3,61.25
  Bottom Layer w0.2: v1(135.575,60.65) 145.35,60.65 146.6,61.9 149.925,61.9 150.328,62.303 v1(150.332,62.303)
BL_KEYBOARD: DD2.27 R21.1 | length 65.2
  Top Layer w0.2: v1(134.5,60.25) 134.85,59.9 136.2,59.9 137.05,60.75 DD2.27@137.05,65.15
  Top Layer w0.5: R21.1@150.35,89.1 150.35,88.2 v1(150.375,88.175)
  Bottom Layer w0.2: v1(134.5,60.25) 134.95,59.8 137.175,59.8 137.525,60.15 145.557,60.15 146.807,61.4 150.45,61.4 151.1,60.75 151.89,60.75 152.575,61.435 152.575,63.625 153.95,65 153.95,67.275 152.975,68.25 152.975,70.861 152.625,71.211 152.625,72.575 149.475,75.725 148.475,75.725 147.35,76.85 147.35,81.025 147.675,81.35 147.675,82.075 148.25,82.65 152.79,82.65 153.75,83.61 153.75,84.19 150.45,87.49 150.45,88.1 v1(150.375,88.175)
CAN_D: DD1.1 DD2.38 | length 35.8
  Top Layer w0.2: v1(122.7,47.575) DD1.1@124.425,47.575 ; v1(126.4,52.9) 126.7,53.2 129.275,53.2 130.013,53.938 130.013,54.945 130.518,55.45 140.5,55.45 142.55,57.5 DD2.38@142.55,65.15
  Bottom Layer w0.2: v1(122.7,47.575) 124.2,47.575 125.075,48.45 125.075,51.575 v1(126.4,52.9)
CAN_EN: DD1.5 DD2.44 | length 55.2
  Top Layer w0.2: DD1.5@118.837,51.385 118.837,52.087 119.45,52.7 120.775,52.7 123.05,54.975 125.9,54.975 v1(125.925,54.95) ; DD2.44@145.5,68.6 146.775,68.6 146.857,68.518 v1(146.857,68.378) ; v1(150.875,66.375) v1(153.25,66.375) ; v1(151.182,60.028) 151.182,60.182 151.625,60.625 v1(151.625,61.475)
  Top Layer w0.5: v1(130.625,60.225) v1(133.125,60.225)
  Bottom Layer w0.2: v1(133.125,60.225) 134.05,59.3 137.382,59.3 137.732,59.65 145.764,59.65 147.014,60.9 150.243,60.9 150.893,60.25 151,60.25 151.182,60.068 v1(151.182,60.028) ; v1(146.857,68.378) 146.857,67.418 147.9,66.375 v1(150.875,66.375) ; v1(151.625,61.475) 152.075,61.925 152.075,64.2 153.25,65.375 v1(153.25,66.375)
  Bottom Layer w0.5: v1(125.925,54.95) 125.925,56.258 129.892,60.225 v1(130.625,60.225)
CAN_R: DD1.4 DD2.37 | length 28.8
  Top Layer w0.2: DD1.4@124.425,51.385 124.425,52.45 125.675,53.7 128.975,53.7 129.513,54.238 129.513,55.152 130.311,55.95 140.275,55.95 142.05,57.725 DD2.37@142.05,65.15
CANH: FU1.2 XP11.1 | length 7.5
  Top Layer w1: XP11.1@109.625,39.375 FU1.2@109.625,46.9
CANL: FU2.2 XP11.2 | length 7.6
  Top Layer w1: XP11.2@114.6,39.35 FU2.2@114.6,46.9
COL1: DD2.60 VD6.2 | length 25.6
  Top Layer w0.2: DD2.60@145.5,76.6 146.825,76.6 147.35,77.125 147.35,93.425 v1(146.525,94.25) ; v1(149.95,96.35) 150.175,96.575 VD6.2@150.175,97.649
  Bottom Layer w0.2: v1(146.525,94.25) 146.653,94.378 148.628,94.378 149.95,95.7 v1(149.95,96.35)
COL2: DD2.59 VD10.2 | length 25.7
  Top Layer w0.2: DD2.59@145.5,76.1 147.032,76.1 147.85,76.918 147.85,94.325 v1(147.075,95.1) ; VD10.2@147.675,97.649 147.675,96.432 148.482,95.625 v1(148.765,95.625)
  Bottom Layer w0.2: v1(147.075,95.1) 148.33,95.1 v1@148.765,95.535
COL3: DD2.58 VD7.2 | length 26.6
  Top Layer w0.2: VD7.2@145.175,97.649 145.175,96.375 145.6,95.95 147.45,95.95 148.35,95.05 148.35,76.711 147.239,75.6 DD2.58@145.5,75.6
COL4: DD2.55 VD11.2 | length 33.6
  Top Layer w0.2: VD11.2@142.7,97.649 142.7,96.4 146.632,92.468 v1(146.632,88.154) ; DD2.55@145.5,74.1 150.075,74.1 150.7,74.725 150.7,81.075 148.85,82.925 148.85,87.75 v1(149.25,88.15)
  Bottom Layer w0.2: v1(146.632,88.154) 149.246,88.154 v1(149.25,88.15)
D/C: DD2.28 XP3.5 | length 112.1
  Top Layer w0.2: v1(121.625,84.3) 119.925,82.6 119.925,78.825 117.725,76.625 117.725,65.985 124.31,59.4 136.7,59.4 137.55,60.25 DD2.28@137.55,65.15 ; v1(153.175,112.475) 153.175,113.925 154.07,114.82 XP3.5@155.375,114.82
  Bottom Layer w0.2: v1(121.625,84.3) 121.825,84.5 126.764,84.5 129.431,87.167 129.431,93.899 129.857,94.325 132.807,94.325 133.757,93.375 138.364,93.375 138.875,92.864 138.875,91.853 139.578,91.15 145.282,91.15 145.807,91.675 145.807,95.107 147.025,96.325 148.5,96.325 150.388,98.213 150.388,99.54 150.7,99.853 150.7,111.718 151.729,112.746 152.904,112.746 v1(153.175,112.475)
GND: C1.2 C2.2 C3.1 C4.1 C5.2 C6.2 C7.1 C8.1 C9.1 C10.1 C11.1 C12.1 C13.1 C14.1 C15.1 C16.1 C17.1 C18.1 C19.1 C20.1 C21.2 C22.2 C24.2 C25.2 C26.1 C27.2 C28.2 C29.2 C30.2 C31.2 C32.1 C33.1 C34.2 C35.1 C38.1 C40.1 C41.1 DA1.11 DA1.19 DA1.20 DA1.21 DA2.9 DA2.11 DA3.2 DD1.2 DD2.9 DD2.12 DD2.24 DD2.33 DD2.43 DD2.57 DD2.66 DD2.78 DD3.4 DD4.4 DD5.5 DD6.15 J1.1 J2.1 QR2.3 R1.2 R4.2 R6.2 R7.2 R8.2 R13.1 R19.1 R32.1 R33.1 R35.1 U1.5 VD1.3 VD3.1 VD4.1 VD5.1 VD8.1 VD9.1 VD12.1 VD13.1 VD14.1 VD15.1 VD16.1 VD17.1 VD18.1 VD19.1 VD21.1 VD23.2 VD24.1 VT1.2 VT3.2 VT5.2 XP1.1 XP2.2 XP3.9 XP4.1 XP6.5 XP7.10 XP8.2 XP9.3 XP10.2 | length 26.2
  Top Layer w0.2: DD2.12@132.1,71.1 134.25,71.1 ; DD2.9@132.1,72.6 134,72.6 ; 135.05,76.725 DD2.78@135.05,78.55 ; DD2.24@135.55,65.15 v1(135.55,66.7) v1@135.55,66.8 ; DD2.33@140.05,65.15 v1@140.05,66.8 ; 141.05,76.725 DD2.66@141.05,78.55 141.05,80.525 142.4,81.875 C18.1@142.4,82.6 ; v1(143.825,68.1) DD2.43@145.5,68.1 ; 143.825,75.1 DD2.57@145.5,75.1
  Top Layer w0.25: 102.425,85.575 DA1.20@103.75,85.575 ; DA1.11@108.15,85.575 109.125,85.575 ; DA2.9@108.475,63.975 108.475,65.475 109.2,66.2 R33.1@109.2,66.9
  Top Layer w0.5: R19.1@119.4,97.95 C4.1@119.4,99.675
  other v1: 122.1,34.6 100,35 105,35 110,35 115,35 125,35 112.5,40 142.5,40 147.5,40 152.5,40 105,45 125,45 148.713,45 123.45,45.675 107.025,45.7 131.8,46.25 136.975,46.3 142.125,46.675 126.825,47 127.9,48.55 132.525,48.65 122.4,48.825 121.8,49.8 107.5,50 132.5,50 137.5,50 101.35,50.875 131.9,51.025 116.675,51.375 112.15,52.675 117.55,53.05 123.775,53.25 115.1,53.55 133.68,53.55 116.475,54.45 148.023,54.45 121.8,55.806 139.6,57.2 125.475,57.7 140.25,57.85 151.3,58.1 148.75,58.225 103.375,58.575 154.025,58.625 140.625,58.675 112.5,60 156.025,60.05 108.25,61.2 109.675,61.2 112.575,61.35 115.8,61.975 108.25,62.35 109.675,62.35 157.3,62.95 111.05,64.05 131.7,64.175 158.475,64.575 147.9,64.6 144.45,65.375 147.7,65.625 132.9,65.725 145.375,65.9 140.05,66.6 110.425,67.65 107.9,68.475 111.425,69.55 137.5,70 142.5,70 120.7,70.5 120.3,72.013 111.025,72.025 112.35,73.6 118.55,74.2 143.9,74.8 124.2,74.975 135,75 140,75 149.9,78.875 150,80.325 114.625,84 106.75,84.275 105.1,84.3 129.575,84.375 138.4,84.6 137.1,84.75 130.55,85.275 105.1,85.35 106.75,85.375 132.325,85.55 130.95,86.375 133.2,86.375 114.6,87.025 110.5,88.125 114.85,88.65 139.95,88.85 109.625,88.95 123.3,89.05 100.675,89.25 120.075,89.7 130.938,89.7 102.5,90 115.175,90.3 114.075,91.35 110.05,91.375 122.575,91.9 153.5,92.325 119.675,92.525 151.375,93.225 155,95 119.4,96.875 114.725,96.95 131.85,99.9 130.4,100.7 125.075,101.575 125.325,103.4 128,103.65 122.9,104.65 132.225,105.25 139.872,105.3 116.875,105.675 123,106.3 124.123,106.35 140.175,107.1 141.75,107.8 136.7,108.75 152.5,110 129.375,110.125 126.1,110.475 128.45,111.075 136.95,112.05 141.65,112.95 139.425,113.15 127.05,114.15 130,115 120.075,119.175 102.5,120 107.5,120 127.5,120 152.5,120 129,123.625
LED_485: DD2.32 R29.1 | length 99.3
  Top Layer w0.2: v1(118.41,102.89) 118.41,107.81 v1(118.425,107.825) ; v1(118.425,112.275) 119.125,111.575 123.75,111.575 125.375,113.2 125.375,118.45 124.05,119.775 R29.1@123,119.775 ; v1(118.431,96.28) 118.375,96.224 118.806,95.793 v1(118.806,88.004) ; v1(119.2,85.75) 118.275,84.825 118.275,79.296 115.725,76.746 115.725,65.864 124.639,56.95 138.25,56.95 139.55,58.25 DD2.32@139.55,65.15
  Bottom Layer w0.2: v1(118.41,102.89) 118.41,96.3 v1(118.431,96.28) ; v1(118.425,107.825) v1(118.425,112.275) ; v1(118.806,88.004) 118.806,86.144 v1(119.2,85.75)
LED_DISPLAY: DD2.25 R11.1 | length 16.4
  Top Layer w0.2: v1(134.675,61.4) 136.05,62.775 DD2.25@136.05,65.15
  Top Layer w0.5: v1(145.05,61.875) 145.6,61.875 146.025,61.45 R11.1@146.025,61.05
  Bottom Layer w0.2: v1(134.675,61.4) 144.575,61.4 v1(145.05,61.875)
LED_STATE: DD2.31 R28.1 | length 47.9
  Top Layer w0.2: v1(117.625,34.8) 117.65,34.775 R28.1@118.9,34.775 ; v1(117.625,38.175) 117.625,42.2 119.375,43.95 v1(119.375,46.05) ; v1(120.95,48.65) 120.95,52.05 123.1,54.2 127.554,54.2 v1(129.081,55.728) ; v1(129.8,57.65) 129.85,57.7 138.075,57.7 139.05,58.675 DD2.31@139.05,65.15
  Bottom Layer w0.2: v1(117.625,34.8) v1(117.625,38.175) ; v1(119.375,46.05) 119.375,47.075 v1(120.95,48.65) ; v1(129.081,55.728) 129.103,55.728 129.8,56.425 v1(129.8,57.65)
MISO: DD2.46 DD3.2 DD4.2 | length 64.9
  Top Layer w0.2: DD4.2@121.07,87.25 121.07,90.504 121.72,91.154 121.72,92.57 121.875,92.725 125.094,92.725 125.294,92.925 127.5,92.925 127.77,92.655 DD3.2@127.77,91.175 127.77,89.37 126.225,87.825 126.225,86.75 126.625,86.35 126.625,83.736 123.614,80.725 123.614,79.694 124.658,78.65 127.3,78.65 v1(129.975,75.975) ; DD2.46@145.5,69.6 148.25,69.6 v1(148.825,69.025)
  Bottom Layer w0.2: v1(129.975,75.975) 129.975,76.57 131.38,77.975 143.875,77.975 144.75,77.1 144.75,75.943 147.568,73.125 148.25,73.125 148.6,72.775 148.6,69.811 148.825,69.586 v1(148.825,69.025)
MISO_DISPLAY: DD2.62 XP3.2 | length 76.6
  Top Layer w0.2: v1(133.35,98.025) 133.575,97.8 133.575,95.643 135.668,93.55 140.989,93.55 143.325,91.214 143.325,85.561 145.35,83.536 145.35,80.5 145,80.15 143.6,80.15 143.05,79.6 DD2.62@143.05,78.55
  Bottom Layer w0.2: v1(133.35,98.025) 133.375,98 133.375,95.878 134.378,94.875 138.157,94.875 138.9,95.618 138.9,99.2 139.25,99.55 147.557,99.55 148.7,100.693 148.7,113.775 153.575,118.65 156.665,118.65 XP3.2@157.915,119.9
MOSI: DD2.45 DD3.5 DD4.5 | length 69.8
  Top Layer w0.2: DD4.5@123.61,94.743 124.443,94.743 125.375,95.675 127.241,95.675 128.316,96.75 129.65,96.75 130.31,97.41 ; v1(125.525,92.166) 125.266,92.166 125.1,92 125.1,87.15 126.125,86.125 126.125,83.943 123.025,80.843 123.025,79.576 124.451,78.15 126.801,78.15 130.151,74.8 v1(130.85,74.8) ; v1(126.325,93.7) 127.3,94.675 127.656,94.675 128.306,95.325 129.825,95.325 130.31,95.81 130.31,97.41 ; DD3.5@130.31,98.668 130.31,97.41 ; DD2.45@145.5,69.1 147.586,69.1 v1(147.807,68.878)
  Bottom Layer w0.2: v1(125.525,92.166) 126.325,92.966 v1(126.325,93.7) ; v1(130.85,74.8) 130.8,74.85 130.8,76.675 131.6,77.475 143.65,77.475 143.65,77.45 144.25,76.85 144.25,75.736 148.05,71.936 148.05,69.136 147.8,68.886 v1(147.807,68.878)
MOSI_DISPLAY: DD2.61 XP3.1 | length 74.3
  Top Layer w0.2: v1(134.075,98.625) 134.075,95.85 135.875,94.05 141.196,94.05 143.825,91.421 143.825,85.768 145.85,83.743 145.85,80.2 145.3,79.65 143.825,79.65 143.55,79.375 DD2.61@143.55,78.55
  Bottom Layer w0.2: v1(134.075,98.625) 134.125,98.575 134.125,95.835 134.585,95.375 137.95,95.375 138.4,95.825 138.4,99.725 138.725,100.05 147.35,100.05 148.2,100.9 148.2,114.15 153.95,119.9 XP3.1@155.375,119.9
NetC1_1: C1.1 DA1.1
NetC4_2: C4.2 DA1.5 DA1.6 XP1.2 | length 44.7
  Top Layer w0.25: DA1.5@105.7,83.125 105.7,81 106.15,80.55 ; 106.2,80.6 DA1.6@106.2,83.125
  Top Layer w0.3: 106.2,80.6 106.225,80.575 108.75,80.575 109.325,80
  Top Layer w1: 109.325,80 111.25,78.075 115.074,78.075 116.875,79.876 116.875,87.629 117.906,88.66 117.906,94.769 117.325,95.35 117.325,101.5 ; XP1.2@114.75,101.5 117.325,101.5 ; C4.2@119.375,101.5 117.325,101.5
NetC5_1: C5.1 DA1.13 R7.1 | length 7.8
  Top Layer w0.25: DA1.13@107.2,86.525 107.2,87.55 107.5,87.85 108.703,87.85 109.528,87.025 R7.1@111.875,87.025 C5.1@111.875,88.625
NetC9_2: C9.2 DD2.19 QR1.1 | length 9
  Top Layer w0.2: C9.2@125.4,65.975 126.025,65.975 126.825,65.175 QR1.1@128.175,65.175 128.175,66.75 129.025,67.6 DD2.19@132.1,67.6
NetC10_2: C10.2 DD2.20 QR1.2 | length 11.3
  Top Layer w0.2: C10.2@125.4,60.675 126.2,60.675 126.7,61.175 QR1.2@128.175,61.175 129.95,62.95 129.95,66.275 130.775,67.1 DD2.20@132.1,67.1